# Altium PCB BEE-DAL_EXP.PcbDoc (part 3 of 5)
Units mm, origin at the board's own origin, x right, y up, seen from the top; angles counter-clockwise.
Board outline 93 x 90 mm, 6 copper layers (L1 TOP, L2 GND, L3 SIGNAL, L4 PWR, L5 GND, L6 BOT), stack 1.516 mm thick; 548 components, 447 nets, 1827 pads, 1142 vias.
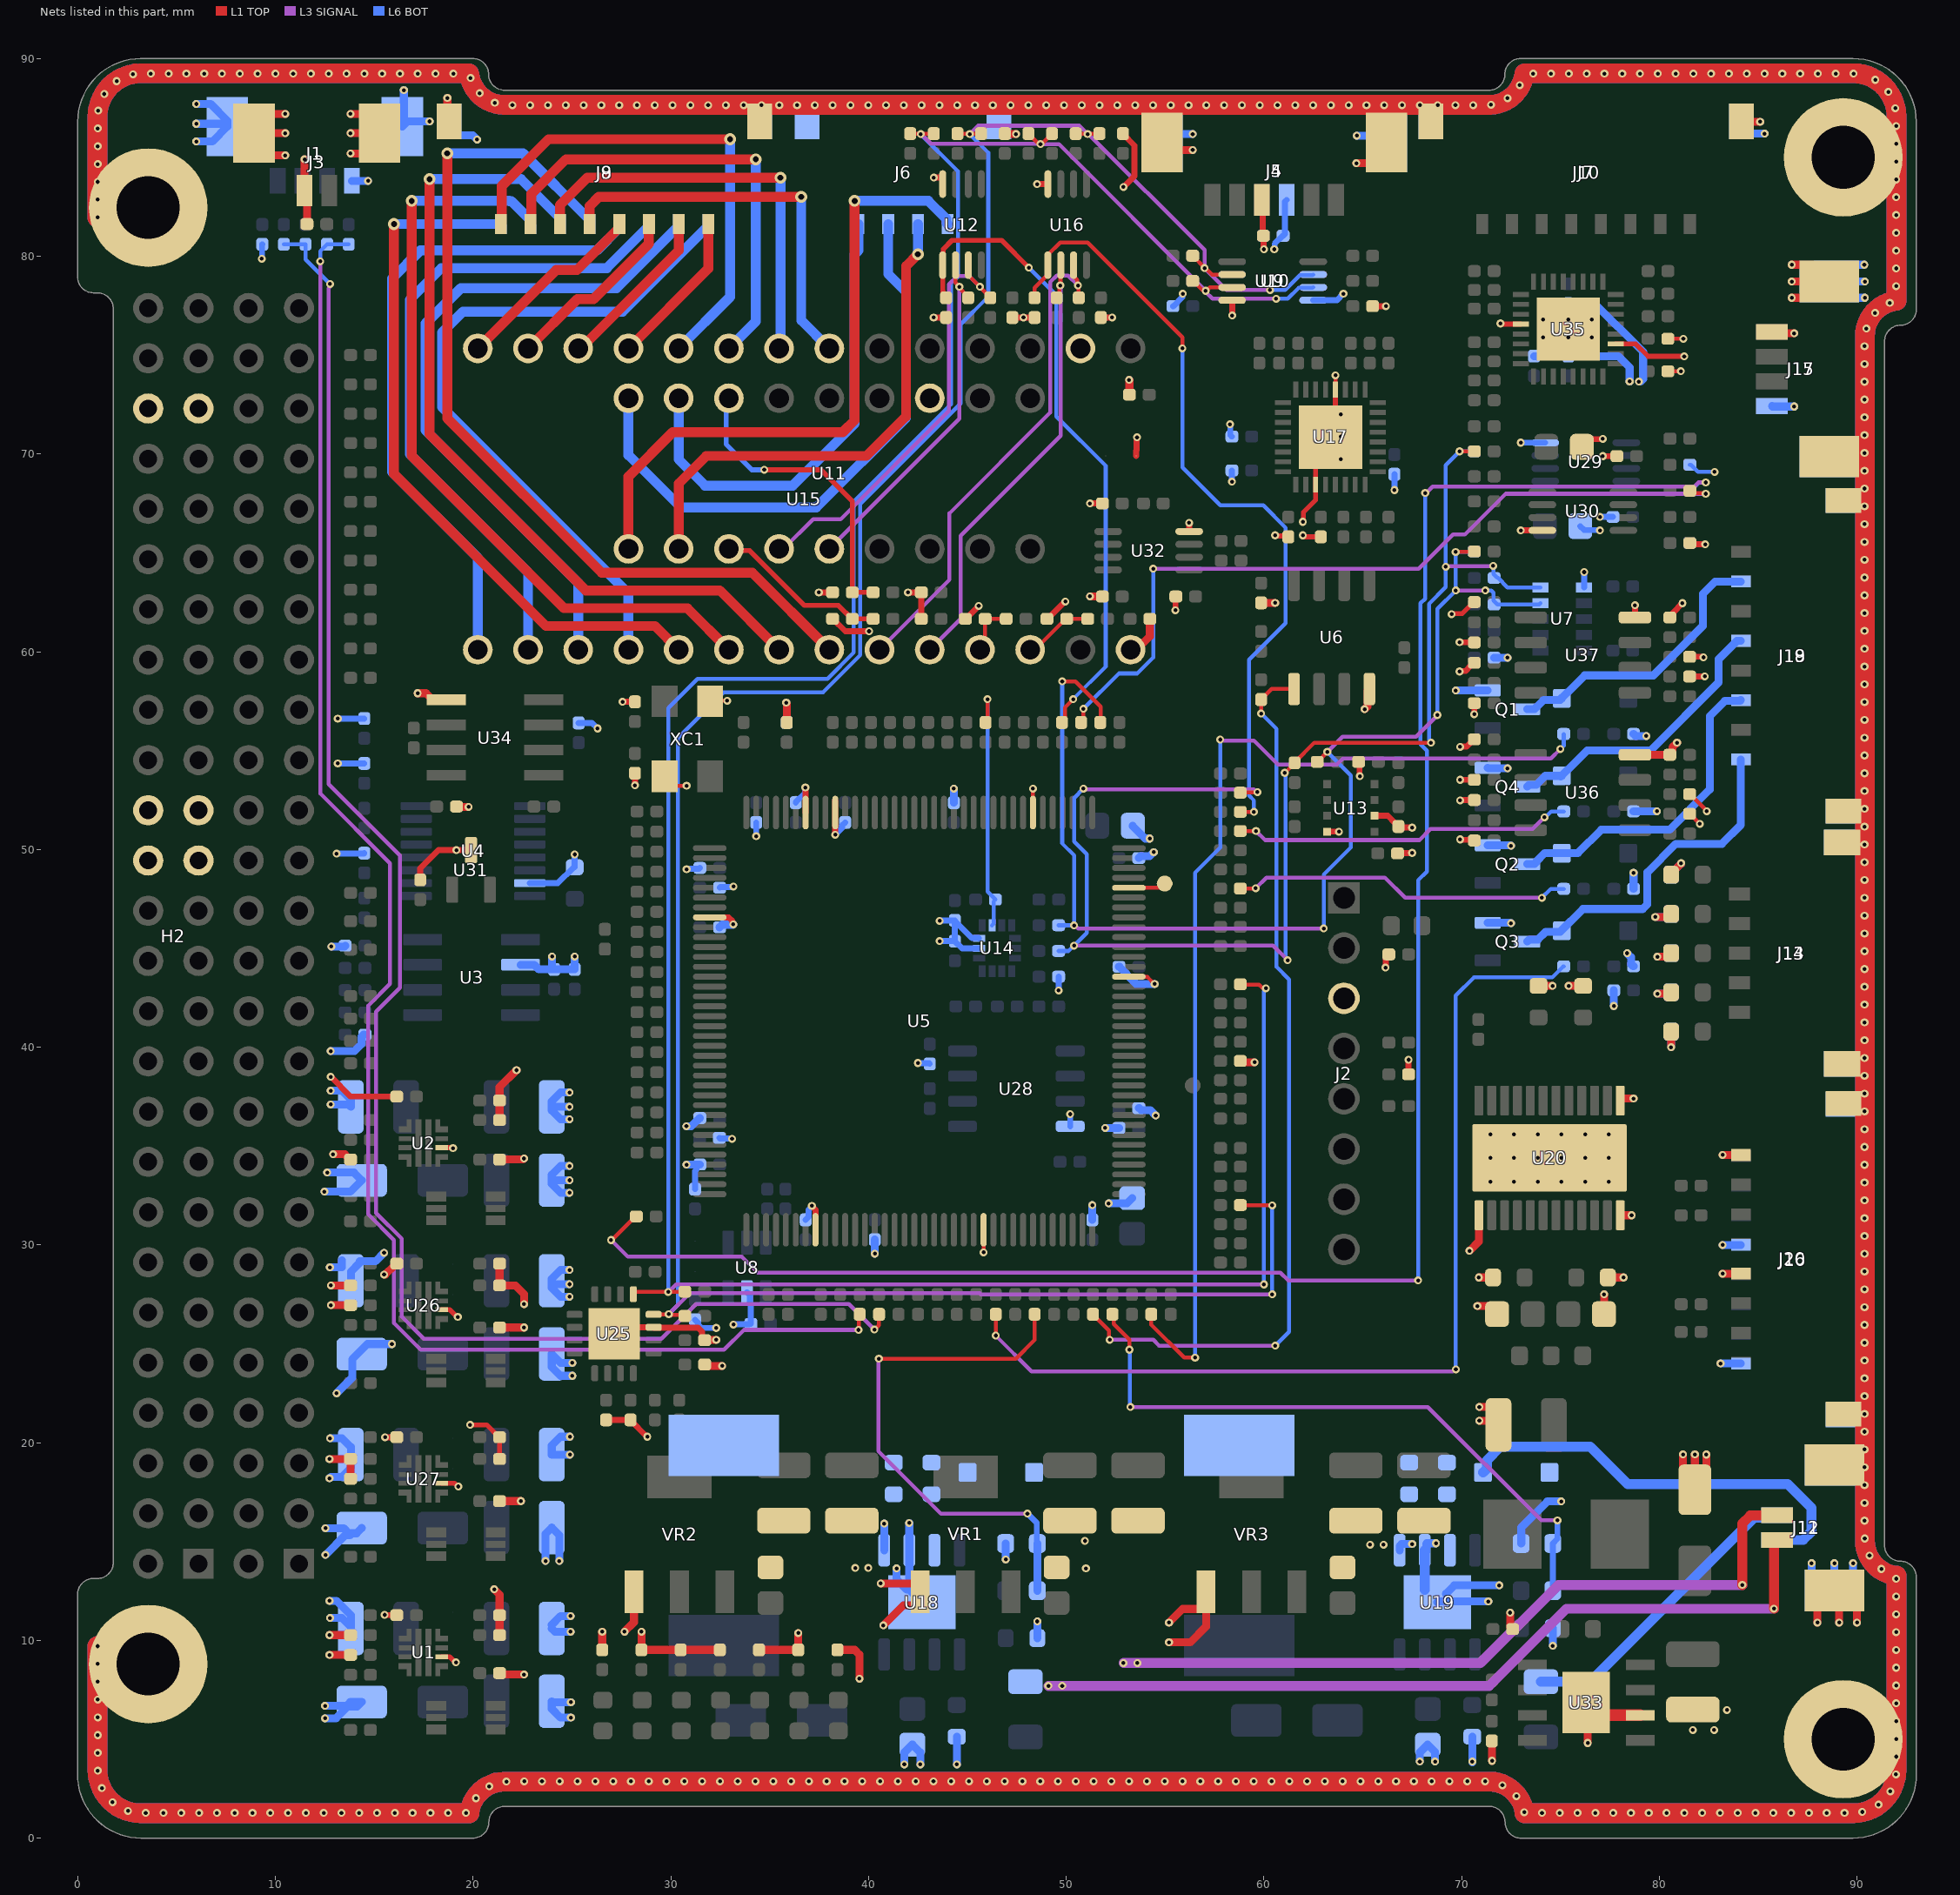
[diagram p7: the nets of this part, all layers, seen from the top]

## Via types
v1: diameter 0.4, hole 0.2, L1 TOP to L6 BOT, tented both sides, 1132 vias
v2: diameter 0.6, hole 0.3, L1 TOP to L6 BOT, tented both sides, 10 vias

## Nets (pads, with @x,y where several pads share a name; then routed paths per layer and width w, separated by ;. In a path a pad name is that pad's centre, name@x,y a point inside that pad or via, vN(x,y) a via of type N, cw(c..) or ccw(c..) an arc to the next point about the centre after c; other vN are vias at no path point) (continued)
GND: C1.1 C2.1 C3.1 C4.1 C5.1 C6.1 C7.1 C8.1 C9.1 C10.1 C11.1 C12.1 C13.2 C14.2 C15.2 C16.1 C18.1 C20.1 C21.1 C22.1 C23.1 C24.1 C25.1 C26.1 C27.2 C28.2 C29.1 C30.1 C31.1 C32.1 C33.1 C34.1 C35.1 C36.1 C37.1 C38.1 C39.1 C40.1 C41.1 C42.1 C43.1 C44.1 C45.1 C46.1 C47.1 C48.1 C49.1 C50.1 C51.1 C52.1 C53.1 C54.1 C55.1 C56.1 C57.1 C58.1 C59.1 C60.1 C61.1 C62.1 C63.1 C64.1 C67.1 C68.2 C71.1 C72.1 C73.2 C76.1 C77.1 C78.2 C79.2 C80.1 C81.1 C82.1 C83.1 C84.1 C85.1 C86.1 C87.1 C88.1 C89.1 C90.1 C91.1 C92.1 C93.1 C109.2 C110.2 C111.2 C112.2 C113.2 C114.1 C115.1 C116.2 C117.1 C118.1 C119.2 C120.1 C121.1 C122.1 C123.1 C124.1 C125.1 C126.1 C127.1 C128.1 C129.1 C130.1 C131.1 C132.1 C133.1 C134.1 C136.2 C137.1 C138.2 C139.1 C141.1 C143.1 C144.1 C164.1 C165.1 C166.2 C167.1 C168.1 C169.1 C170.1 C171.1 C172.1 C173.1 C174.1 C175.1 C176.1 C177.1 C178.1 C179.1 C406.1 C407.1 C408.1 C411.1 D1.2 D2.2 D8.2 D9.2 D17.2 H2.29 H2.30 H2.31 H2.32 H2.47 H2.48 Hole1.1 Hole2.1 Hole3.1 Hole4.1 J1.4 J1.M1 J1.M2 J2.3 J3.2 J3.M1 J3.M2 J4.4 J4.M1 J4.M2 J5.4 J5.M1 J5.M2 J6.M1 J6.M2 J7.M1 J7.M2 J8.M1 J8.M2 J9.M1 J9.M2 J10.M1 J10.M2 J11.M1 J11.M2 J12.M1 J12.M2 J13.M1 J13.M2 J14.M1 J14.M2 J15.4 J15.M1 J15.M2 J16.4 J16.8 J16.M1 J16.M2 J17.4 J17.M1 J17.M2 J18.M1 J18.M2 J19.M1 J19.M2 J20.4 J20.8 J20.M1 J20.M2 JP4.1 Q1.2 Q2.2 Q3.2 Q4.2 R5.1 R6.2 R7.1 R8.1 R13.1 R14.1 R15.1 R16.1 R20.1 R35.2 R91.1 R113.1 R124.1 R125.1 R130.2 R133.2 R135.1 R144.2 R152.2 R154.1 R156.1 R163.2 R172.1 R175.2 R178.2 R256.1 R257.1 R258.1 R263.1 R264.2 R265.1 R266.1 R271.1 R272.2 R273.1 R274.1 R278.2 R288.2 R299.2 R319.1 R320.1 R322.1 R332.2 R338.1 R339.1 R342.1 R343.1 R346.1 R349.1 R352.1 R355.1 R417.1 U1.8 U2.8 U3.2 U4.15 U5.8 U5.44 U5.61 U5.95 U5.115 U5.135 U5.138 U6.4 U7.6 U8.2 U9.4 U10.4 U11.3 U12.4 U13.1 U13.7 U14.6 U14.7 U15.1 U15.27 U16.4 U17.4 U17.19 U17.33 U18.1 U18.2 U18.9 U19.1 U19.2 U19.9 U20.1 U20.13 U20.24 U20.25 U25.3 U25.17 U26.8 U27.8 U28.4 U29.4 U30.4 U31.3 U32.4 U33.6 U33.9 U34.5 U35.4 U35.19 U35.33 U36.4 U37.4 VR1.1 VR2.1 VR3.1 XC1.2 XC1.4 | length 989.6
  L1 TOP w0.2: XC1.4@29.69,53.695 30.165,53.22 v1(30.8,53.22) ; XC1.2@31.99,57.495 31.99,57.485 31.995,57.48 32.034,57.519 v1(32.858,57.519) ; v1@45.821,29.621 U5.61@45.822,30.764 ; U5.115@48.322,51.864 v1@48.321,53.074 ; U5.95@53.172,43.564 53.191,43.545 54.113,43.545 54.458,43.2 v1(54.475,43.2) ; U17.4@63.62,73.25 v1(63.62,73.974) ; R417.1@80.435,74.183 v1(81.093,74.183) ; C411.1@80.435,75.825 v1(81.218,75.825) ; C172.1@81.535,51.801 81.548,51.801 82.047,51.302 v1(82.047,51.29) ; C171.1@81.535,52.796 81.56,52.796 82.4,51.956 v1(82.4,51.934)
  L1 TOP w0.25: U1.8@18.412,9.167 18.818,9.167 19.095,8.89 v1(19.135,8.89) ; U27.8@18.412,17.942 19.057,17.942 19.219,17.78 v1(19.26,17.78) ; U26.8@18.412,26.721 18.822,26.721 19.19,26.353 v1(19.231,26.353) ; U2.8@18.412,34.919 18.963,34.919 v1(18.989,34.893) ; v1(19.85,20.9) 20.69,20.9 21.318,20.272 C132.1@21.343,20.272 R274.1@21.343,19.172 ; v1(60.571,65.885) 60.6,65.857 61.189,65.857 R172.1@61.237,65.809 ; v1(61.975,65.885) 61.975,65.862 62.029,65.809 C67.1@62.879,65.809 ; v1(61.975,66.569) 62.004,66.598 62.004,67.058 62.62,67.674 U17.19@62.62,68.45 62.62,70.1 U17.33@63.37,70.85 ; U17.33@63.62,71.1 U17.4@63.62,73.25 ; v1(69.5,61.9) 69.519,61.919 70.026,61.919 70.618,62.511 R355.1@70.643,62.511 ; v1(71.968,76.6) 72.009,76.6 72.043,76.566 U35.4@72.993,76.566 ; U35.19@77.794,75.566 78.802,75.566 79.432,74.937 v1(81.263,74.937)
  L1 TOP w0.3: v1(12.8,38.5) 12.807,38.5 13.806,37.501 C10.1@16.14,37.501 ; v1(15.53,11.29) 15.539,11.281 16.131,11.281 C4.1@16.14,11.273 ; v1(15.55,20.272) C131.1@16.14,20.272 ; C141.1@17.33,48.462 17.33,49.045 18.247,49.962 v1(19.16,49.962) U31.3@19.9,49.962 ; C109.2@26.733,21.148 C111.2@27.966,21.148 ; U25.17@27.458,25.833 U25.3@29.133,25.833 ; v1(27.558,57.468) v1(27.558,57.468) 28.189,57.466 C25.1@28.19,57.465 ; C111.2@27.966,21.123 28.789,20.3 v1(28.814,20.3) ; v1(28.19,53.241) C26.1@28.19,53.855 ; U25.3@29.153,25.813 31.38,25.813 31.578,25.615 31.578,25.315 31.693,25.2 C112.2@31.715,25.178 ; U5.8@31.972,46.564 32.936,46.564 33.116,46.385 33.116,46.291 33.166,46.241 v1(33.166,46.214) ; v1(36.809,53.128) 36.822,53.116 U5.138@36.822,51.864 ; v1(37.14,31.975) 37.14,31.948 37.322,31.766 U5.44@37.322,30.764 ; v1(37.49,63) R91.1@38.184,63 ; R135.1@38.184,61.66 38.209,61.66 38.833,61.036 v1(40.031,61.036) ; v1(38.322,50.745) U5.135@38.322,51.864 U5.135@38.322,52.458 ; v1(42,63) C52.1@42.675,63 C53.1@42.675,61.66 ; v1(43.3,76.9) R332.2@43.927,76.9 ; v1(43.305,83.981) 43.732,83.981 43.755,83.957 U12.4@43.755,83.65 ; R156.1@44.9,61.66 44.925,61.66 45.575,62.31 v1(45.575,62.318) ; C168.1@47.283,76.9 v1(47.842,76.9) R163.2@48.401,76.9 ; v1(48.527,83.65) U16.4@49.076,83.65 ; R154.1@49.027,61.66 49.052,61.66 49.909,62.518 49.937,62.518 v1(49.956,62.537) ; v1(51.2,67.5) R278.2@51.834,67.5 ; C61.1@51.757,76.9 v1(52.322,76.9) ; C60.1@52.875,86.2 52.875,86.175 53.45,85.6 53.45,84.05 v1(52.9,83.5) ; JP4.1@53.537,69.9 53.537,70.168 53.565,70.196 53.565,70.823 v1(53.584,70.842) ; v1(55.523,62.1) 55.535,62.112 55.535,62.78 C165.1@55.548,62.793 ; U32.4@56.223,66.082 v1(56.223,66.521) ; U9.4@58.395,77.775 58.4,77.77 v1(58.4,77) ; J4.4@59.9,82.85 59.9,82.55 59.938,82.513 59.938,81.071 C50.1@59.963,81.071 ; C50.1@59.975,81.034 60,81.034 59.987,81.022 59.987,80.365 v1(60,80.352) ; U13.1@63.2,50.9 v1(63.8,50.9) ; R144.2@64.79,54.43 64.837,54.384 64.837,53.719 v1(64.856,53.7) ; R130.2@65.5,77.475 v1(66.177,77.475) ; U13.7@65.6,51.7 66.269,51.7 66.634,51.335 66.659,51.335 66.809,51.185 C54.1@66.809,51.16 66.85,51.119 67.481,51.119 v1(67.5,51.1) ; v1(66.15,44.025) 66.169,44.044 66.169,44.54 R35.2@66.32,44.69 ; C55.1@66.759,49.8 66.771,49.812 67.487,49.812 v1(67.5,49.825) ; C23.1@67.32,38.625 v1(67.32,39.364) ; v1(69.9,59) 69.919,59.019 70.195,59.019 70.488,59.312 70.513,59.312 C179.1@70.643,59.443 ; v1(69.9,60.481) 69.908,60.473 70.636,60.473 C178.1@70.643,60.466 ; v1(69.925,52.485) 69.932,52.492 70.637,52.492 C174.1@70.643,52.498 ; v1(69.927,50.507) 69.946,50.488 70.608,50.488 C170.1@70.643,50.453 ; v1(69.927,53.521) C173.1@70.643,53.521 70.751,53.521 C173.1@70.768,53.538 ; v1(69.927,55.185) 69.946,55.204 70.256,55.204 70.618,55.567 R349.1@70.643,55.567 ; v1(70.643,56.837) C175.1@70.643,57.397 ; v1(72.993,66.134) U30.4@74.085,66.134 U30.4@74.429,66.134 ; C138.2@76.086,70.365 76.47,70.749 77.124,70.749 v1(77.143,70.769) ; v1(77.145,69.889) C139.1@77.854,69.889 ; U37.4@78.77,61.731 v1(78.77,62.35) ; R352.1@80.535,61.731 80.56,61.731 80.71,61.881 80.71,61.991 v1@81.153,62.434 ; C177.1@81.535,58.745 81.537,58.748 82.298,58.748 v1(82.3,58.75) ; C176.1@81.535,59.741 81.541,59.747 82.179,59.747 82.211,59.715 v1(82.238,59.715) ; R299.2@81.543,65.497 81.606,65.434 v1@82.298,65.434
  L1 TOP w0.4: J3.M2@8.925,86.35 9.775,87.2 v1(10.5,87.2) ; v1(10.5,85.1) 9.775,85.1 8.925,85.95 J3.M2@8.925,86.221 v1(10.5,86.221) ; v1(11.475,84.9) J3.2@11.475,83.321 11.6,83.196 C47.1@11.6,81.63 ; v1(12.74,9.263) R7.1@13.805,9.263 ; v1(12.74,10.268) R6.2@13.805,10.268 ; v1(12.74,19.172) R272.2@13.805,19.172 R273.1@13.805,18.172 ; v1@12.811,26.951 R265.1@13.805,26.951 ; v1@12.811,27.951 R264.2@13.805,27.951 ; v1(12.919,34.581) 13.516,34.581 13.78,34.317 R15.1@13.805,34.317 ; v1(13.8,85.2) 14.425,85.2 15.275,86.05 J3.M1@15.275,86.221 ; v1(13.8,86.221) J3.M1@15.275,86.221 ; v1(13.8,87.2) 14.425,87.2 15.275,86.35 J3.M1@15.275,86.221 ; v1(15.5,28.5) 15.564,28.5 16.015,28.951 16.04,28.951 C125.1@16.14,29.051 ; v1(17.2,57.9) 17.623,57.9 17.863,57.66 17.863,57.635 17.934,57.565 U34.5@18.654,57.565 U34.5@18.685,57.565 ; v1(18.7,88) 18.7,86.915 J9.M2@18.795,86.82 ; C134.1@19.16,52.17 19.175,52.155 v1(19.77,52.155) ; v1(21.07,12.58) 21.343,12.307 C5.1@21.343,11.273 R8.1@21.343,10.291 ; C6.1@21.343,8.341 21.411,8.273 v1(22.577,8.273) ; C133.1@21.343,17.042 v1(22.42,17.042) ; C127.1@21.343,25.821 v1(22.583,25.821) ; R266.1@21.343,27.951 C126.1@21.343,29.051 ; C12.1@21.343,34.317 22.53,34.317 v1(22.583,34.37) ; R16.1@21.343,36.317 C11.1@21.343,37.301 21.343,37.98 v1(22.2,38.837) ; R266.1@21.368,27.951 22.14,27.951 22.583,27.508 v1(22.583,27.002) ; R5.1@26.535,9.52 v1(26.535,10.44) ; U25.17@27.133,25.508 U25.17@27.458,25.833 ; v1(27.664,10.44) 28.139,10.915 VR2.1@28.139,12.461 ; v1(28.518,10.44) R271.1@28.518,9.52 R263.1@30.501,9.52 R13.1@32.483,9.52 ; C112.2@31.64,25.2 31.693,25.2 v1(32.3,25.2) ; C110.2@31.715,23.95 31.773,23.95 31.84,23.883 v1(32.6,23.883) ; R257.1@34.466,9.52 R258.1@36.448,9.52 36.448,10.368 v1(36.45,10.37) ; v1(35.84,57.425) 35.87,57.395 R113.1@35.87,56.42 ; R256.1@38.431,9.52 39.306,9.52 39.54,9.286 v1(39.54,8.06) ; v1(40.62,12.88) 42.338,12.88 42.613,12.605 VR1.1@42.613,12.461 42.613,12.058 42.338,11.783 41.773,11.783 v1(40.75,10.76) ; C167.1@46.894,86.2 46.919,86.175 v1(47.465,86.175) ; v1(51.2,62.8) 51.827,62.8 C164.1@51.834,62.793 ; v1(53.181,73.747) 53.2,73.728 C58.1@53.2,73 ; U15.1@53.26,60.1 53.558,60.1 54.234,60.777 54.234,61.56 C59.1@54.234,61.66 ; J4.M2@54.85,85.75 54.85,85.45 54.925,85.375 v1(56.4,85.375) ; v1(55.2,9.9) 56.279,9.9 57.075,10.696 VR3.1@57.075,11.861 ; v1(55.2,10.9) 55.886,11.586 56.8,11.586 VR3.1@57.075,11.861 ; VR3.1@57.075,12.461 VR3.1@57.075,11.861 ; R14.1@58.808,39.301 58.869,39.24 v1(59.53,39.24) ; C48.1@59.86,62.47 v1(60.571,62.47) ; v1(64.675,84.7) 65.35,84.7 66.2,85.55 J4.M1@66.2,85.75 ; v1(65.1,57.095) 65.241,57.236 65.241,58.017 U6.4@65.336,58.112 ; v1(70.4,29.7) 70.876,30.176 U20.13@70.876,31.5 ; v1(70.8,26.904) 71.399,26.904 71.795,26.508 C78.2@71.795,26.5 ; v1(70.876,28.353) C81.1@71.592,28.353 ; v1(70.9,21.106) 71.661,21.106 C22.1@71.867,20.9 71.867,21.354 71.421,21.8 v1(70.9,21.8) ; R322.1@71.532,4.912 71.532,3.918 v1(71.54,3.91) ; v1(72.457,11.4) 72.457,10.667 72.557,10.567 C21.1@72.582,10.567 ; C82.1@73.894,43.1 v1(74.6,43.1) ; v1(75.413,43.1) C83.1@76.151,43.1 ; v1(76.38,4.81) U33.9@76.38,6.538 ; C79.2@77.2,26.5 77.207,26.507 v1(77.207,27.5) ; C80.1@77.4,28.353 v1(78.195,28.353) ; U20.24@78.026,31.5 v1(78.6,31.5) ; U20.1@78.026,37.3 78.026,37.375 78.051,37.4 v1(78.7,37.4) ; U36.4@78.77,54.787 R346.1@80.449,54.787 ; v1(79.8,46.582) 80.445,46.582 C90.1@80.6,46.738 ; v1(79.9,42.7) 80.53,42.7 C92.1@80.6,42.77 ; v1(79.9,44.572) 80.418,44.572 C91.1@80.6,44.754 ; R346.1@80.535,54.787 80.56,54.787 80.66,54.887 80.66,55.166 80.894,55.4 v1(80.9,55.4) ; v1(80.6,40) C93.1@80.6,40.786 ; C89.1@80.6,48.721 80.6,48.771 81.1,49.271 v1(81.1,49.3) ; v1(81.2,19.4) 81.204,19.396 81.204,18.212 D17.2@81.8,17.617 ; v1(81.8,19.4) D17.2@81.8,17.617 ; v1(82.377,19.396) 82.377,18.194 D17.2@81.8,17.617 ; v1(83.2,28.548) J20.4@84.13,28.548 ; v1(83.2,34.548) J20.8@84.13,34.548 ; J10.M1@84.155,86.82 84.175,86.8 v1(85.1,86.8) ; J17.4@85.7,76.172 85.772,76.1 v1(86.825,76.1) ; v1(86.7,77.9) 87.778,77.9 J17.M2@88.6,78.722 ; v1(86.7,78.722) J17.M2@88.6,78.722 ; v1(86.7,79.572) 87.75,79.572 J17.M2@88.6,78.722 ; v1(88,10.9) 88,11.675 88.85,12.525 J11.M1@88.862,12.525 ; v1(89.1,10.9) 89.1,12.287 J11.M1@88.862,12.525 ; v1(90,10.9) 90,11.675 89.15,12.525 J11.M1@88.862,12.525
  L1 TOP w0.6: U33.9@76.31,6.848 76.945,6.213 U33.6@79.034,6.213
  L1 TOP w1: v1@1,3.454 ccw(c3.2,3.454) 3.2,1.254 4.343,1.254 5.243,1.254 6.143,1.254 7.043,1.254 7.943,1.254 8.843,1.254 9.743,1.254 10.643,1.254 11.543,1.254 12.443,1.254 13.343,1.254 14.243,1.254 15.143,1.254 16.043,1.254 16.943,1.254 17.843,1.254 18.743,1.254 19.811,1.254 cw(c21.6,1.054) v1@21.561,2.854 ; v1@1,3.467 1,4.307 1,5.207 1,6.107 1,7.007 1,7.907 1,8.807 Hole1.1@1,9.707 ; Hole2.1@1,81.963 1,82.863 1,83.763 1,84.663 1,85.563 1,86.463 1,87.054 cw(c3.2,87.054) 3.163,89.254 ; 3.175,89.254 3.702,89.254 4.602,89.254 5.502,89.254 6.402,89.254 7.302,89.254 8.202,89.254 9.102,89.254 10.002,89.254 10.902,89.254 11.802,89.254 12.702,89.254 13.602,89.254 14.502,89.254 15.402,89.254 16.302,89.254 17.202,89.254 18.102,89.254 19.002,89.254 19.8,89.254 ccw(c21.589,89.454) 21.561,87.654 ; v1@21.59,2.854 22.587,2.854 23.487,2.854 24.387,2.854 25.287,2.854 26.187,2.854 27.087,2.854 27.987,2.854 28.887,2.854 29.787,2.854 30.687,2.854 31.587,2.854 32.487,2.854 33.387,2.854 34.287,2.854 35.187,2.854 36.087,2.854 36.987,2.854 37.887,2.854 38.787,2.854 39.687,2.854 40.587,2.854 41.487,2.854 42.387,2.854 43.287,2.854 44.187,2.854 45.087,2.854 45.987,2.854 46.887,2.854 47.787,2.854 48.687,2.854 49.587,2.854 50.975,2.854 51.387,2.854 52.287,2.854 53.187,2.854 54.087,2.854 54.987,2.854 55.887,2.854 56.787,2.854 57.687,2.854 58.587,2.854 59.487,2.854 60.387,2.854 61.287,2.854 62.026,2.854 62.187,2.854 63.087,2.854 63.987,2.854 64.887,2.854 65.787,2.854 66.687,2.854 67.587,2.854 68.487,2.854 69.387,2.854 70.287,2.854 71.187,2.854 71.399,2.854 ; 21.59,87.653 21.99,87.653 22.89,87.653 23.79,87.653 24.69,87.653 25.59,87.653 26.49,87.653 27.39,87.653 28.29,87.653 29.19,87.653 30.09,87.653 30.99,87.654 31.89,87.654 32.79,87.654 33.69,87.654 34.59,87.654 35.49,87.654 36.39,87.654 37.29,87.654 38.119,87.654 38.19,87.654 39.09,87.654 39.99,87.654 40.89,87.654 41.79,87.654 42.015,87.654 42.69,87.654 43.59,87.654 44.49,87.654 45.39,87.654 46.29,87.654 47.19,87.654 48.09,87.654 48.99,87.654 49.89,87.654 50.79,87.654 51.69,87.654 52.59,87.654 53.49,87.654 54.39,87.654 55.29,87.654 56.19,87.654 57.09,87.654 57.99,87.654 58.89,87.654 59.79,87.654 60.69,87.654 61.59,87.654 62.49,87.654 63.39,87.654 64.29,87.654 65.19,87.654 66.09,87.654 66.99,87.654 67.89,87.654 68.79,87.654 69.69,87.654 70.59,87.654 v1@71.399,87.654 ; 71.429,2.854 cw(c71.4,1.054) 73.189,1.254 74.069,1.254 74.969,1.254 75.869,1.254 76.769,1.254 77.669,1.254 78.569,1.254 79.469,1.254 80.369,1.254 81.269,1.254 82.169,1.254 83.069,1.254 83.969,1.254 84.869,1.254 85.769,1.254 86.669,1.254 87.569,1.254 88.469,1.254 89.8,1.254 ccw(c89.8,3.454) 92,3.454 92,4.117 92,5.017 92,5.917 92,6.817 92,7.717 92,8.617 92,9.517 92,10.417 92,11.317 92,12.217 92,13.265 cw(c92.2,15.054) v1@90.4,15.049 ; v1@71.429,87.654 ccw(c71.389,89.454) 73.178,89.254 74.525,89.254 75.425,89.254 76.325,89.254 77.225,89.254 78.125,89.254 79.025,89.254 79.925,89.254 80.825,89.254 81.725,89.254 82.625,89.254 83.525,89.254 84.425,89.254 85.325,89.254 86.225,89.254 87.125,89.254 88.025,89.254 88.925,89.254 v1@89.789,89.254 ; v1@89.815,89.254 cw(c89.8,87.054) 92,87.06 92,85.684 92,84.784 92,83.884 92,82.984 92,82.084 92,81.184 92,80.284 92,79.384 92,78.484 92,77.75 ccw(c92.2,75.961) 90.4,75.961 ; v1@90.4,15.054 90.4,16.052 90.4,16.952 90.4,17.852 90.4,18.752 90.4,19.652 90.4,20.552 90.4,21.452 90.4,22.352 90.4,23.252 90.4,24.152 90.4,25.052 90.4,25.952 90.4,26.852 90.4,27.752 90.4,28.652 90.4,29.552 90.4,30.452 90.4,31.352 90.4,32.252 90.4,33.152 90.4,34.052 90.4,34.952 90.4,35.852 90.4,36.752 90.4,37.652 90.4,38.552 90.4,39.452 90.4,40.352 90.4,41.252 90.4,42.152 90.4,43.052 90.4,43.952 90.4,44.852 90.4,45.752 90.4,46.652 90.4,47.552 90.4,48.452 90.4,49.352 90.4,50.252 90.4,51.152 90.4,52.052 90.4,52.952 90.4,53.852 90.4,54.752 90.4,55.652 90.4,56.552 90.4,57.452 90.4,58.352 90.4,59.252 90.4,60.152 90.4,61.052 90.4,61.952 90.4,62.852 90.4,63.752 90.4,64.652 90.4,65.552 90.4,66.452 90.4,67.352 90.4,68.252 90.4,69.152 90.4,70.052 90.4,70.952 90.4,71.852 90.4,72.752 90.4,73.652 90.4,74.552 90.4,75.452 90.4,75.956
  L6 BOT w0.2: R288.2@81.543,69.457 81.595,69.457 81.953,69.099 v1@82.797,69.099
  L6 BOT w0.3: v1(9.31,79.87) 9.325,79.885 9.325,80.59 C18.1@9.34,80.605 ; v1(13.1,49.784) 13.113,49.797 14.487,49.797 C144.1@14.501,49.811 ; v1(13.156,54.35) C143.1@14.501,54.35 ; v1(13.156,56.619) R319.1@14.501,56.619 ; U4.15@22.871,48.294 24.286,48.295 25.09,49.098 C16.1@25.14,49.098 v1(25.14,49.748) ; R320.1@25.34,56.398 26.019,56.398 v1(26.3,56.117) ; v1(30.8,48.998) 30.82,49.017 31.424,49.017 C38.1@31.472,49.064 ; R125.1@31.228,26.213 31.378,26.063 31.378,25.976 31.554,25.8 v1(32.3,25.8) ; R124.1@31.228,32.819 31.228,33.739 31.297,33.807 31.297,33.914 31.437,34.055 31.447,34.064 C40.1@31.472,34.064 ; C31.1@32.457,35.414 32.491,35.381 33.082,35.381 v1(33.101,35.362) ; C29.1@32.472,48.064 32.51,48.103 33.151,48.103 v1(33.17,48.122) ; v1(33.172,25.97) 33.189,25.987 33.936,25.987 C49.1@33.948,25.976 ; U8.2@33.853,27.606 33.998,27.461 33.998,27.031 34.053,26.976 C49.1@34.053,26.004 ; v1(34.322,50.664) C37.1@34.322,51.364 ; C45.1@36.322,52.364 36.322,52.389 36.79,52.858 36.79,53.109 v1(36.809,53.128) ; C32.1@36.822,31.264 36.972,31.414 36.972,31.78 37.14,31.948 v1(37.14,31.975) ; v1@38.341,50.765 38.672,51.095 38.672,51.214 C36.1@38.822,51.364 ; v1(42.5,39.2) 42.519,39.181 43.075,39.181 C166.2@43.1,39.156 ; v1(43.6,45.364) C56.1@44.369,45.364 C57.1@44.369,46.389 ; v1(43.6,46.389) 43.612,46.402 44.357,46.402 C57.1@44.369,46.414 C57.1@44.369,46.389 ; C56.1@44.369,45.339 44.519,45.189 44.544,45.189 44.733,45 U14.6@45.59,45 ; U14.7@45.59,45.5 45.565,45.525 45.233,45.525 C57.1@44.369,46.389 ; R152.2@49.619,43.564 R152.2@49.619,43.564 49.62,42.871 v1(49.621,42.87) ; U28.4@50.204,35.995 v1(50.204,36.614) ; R133.2@55.4,77.475 55.425,77.475 55.881,77.931 55.881,78.081 v1(55.9,78.1) ; v1(58.287,71.5) 58.306,71.481 58.306,70.959 C64.1@58.385,70.88 ; v1(58.385,68.6) C63.1@58.385,69.163 ; v1(60.525,80.352) 60.544,80.371 60.544,80.628 60.95,81.034 C51.1@60.975,81.034 61.063,81.122 61.063,82.762 J5.4@61.15,82.85 ; U10.4@62.495,77.775 63.698,77.775 v1(64.023,78.1) ; v1(66.604,68.175) C62.1@66.604,68.973 ; v1(72.993,70.572) U29.4@74.233,70.572 ; C136.2@76.008,66.347 76.202,66.154 76.981,66.154 v1(77,66.134) ; U7.6@76.194,63.253 76.198,63.257 76.198,64.023 v1(76.202,64.027) ; v1(77,66.817) C137.1@77.658,66.817
  L6 BOT w0.4: v1(6,85.8) 6.814,85.8 J1.M1@7.574,86.56 ; v1(6,86.7) 7.434,86.7 J1.M1@7.574,86.56 ; v1(6,87.7) 6.724,87.7 7.574,86.85 J1.M1@7.574,86.56 ; v1(12.48,32.689) 13.791,32.689 D2.2@14.369,33.267 13.977,33.659 v1(12.62,33.659) ; v1(12.51,6.059) 13.069,6.059 D1.2@13.66,6.65 ; v1(12.51,6.69) 13.52,6.69 D1.2@13.56,6.65 ; v1(12.536,14.32) 13.541,15.325 D9.2@13.771,15.325 ; v1(12.536,15.675) 13.455,15.675 D9.2@13.75,15.38 ; v1(12.74,12) 13.091,12 13.819,11.273 C3.1@13.819,10.684 ; v1(12.74,18.195) 12.817,18.272 13.372,18.272 13.819,18.718 C130.1@13.819,19.393 13.819,19.774 13.372,20.22 v1(12.77,20.22) ; v1(12.76,28.862) 13.372,28.862 C124.1@13.372,29.22 ; v1(12.77,11.13) 13.372,11.13 C3.1@13.819,10.684 ; v1(12.8,37.1) 13.701,37.1 C9.1@13.819,36.982 13.819,37.354 13.372,37.8 v1(12.8,37.8) ; v1(12.8,39.8) 14,39.8 14.365,40.165 14.365,40.533 14.465,40.633 C15.2@14.483,40.633 ; v1(12.829,45.09) 13.491,45.09 R20.1@13.533,45.133 ; v1(13.094,22.49) 13.885,23.281 13.885,24.213 14.657,24.984 v1(15.896,24.984) ; D9.2@13.81,15.415 14.106,15.415 D9.2@14.369,15.678 ; C3.1@13.819,10.598 C3.1@13.819,10.684 ; C124.1@13.819,28.187 13.819,28.644 14.265,29.09 14.265,29.169 15.069,29.169 v1(15.5,29.6) ; J1.4@13.874,83.81 v1(14.69,83.81) ; J1.M2@16.424,86.56 J1.M2@16.5,86.636 ; v1(16.5,88.4) J1.M2@16.5,86.636 ; v1(17.8,86.82) 16.684,86.82 J1.M2@16.5,86.636 ; J8.M1@18.795,86.82 18.795,86.545 19.22,86.12 19.98,86.12 v1(20.2,85.9) ; U3.2@22.402,44.168 23.092,44.168 23.32,43.939 C14.2@24.093,43.939 ; v1(23.67,14.01) 23.67,15.39 C128.1@23.983,15.702 24.36,15.325 v1(24.36,14.01) ; C2.1@23.983,10.598 24.141,10.44 v1(24.93,10.44) ; C2.1@23.983,10.784 24.429,11.23 v1(24.93,11.23) ; C122.1@23.983,24.485 C122.1@23.983,24.48 ; C123.1@23.983,28.187 23.983,27.826 24.429,27.38 v1(24.875,27.38) ; C123.1@23.983,28.284 24.429,28.73 v1(24.875,28.73) ; C7.1@23.983,33.447 C7.1@23.983,33.267 23.983,33.086 24.429,32.64 v1(24.875,32.64) ; C7.1@23.983,33.543 24.429,33.99 v1(24.875,33.99) ; C8.1@23.983,37.162 C8.1@23.983,36.982 23.983,36.801 24.429,36.355 v1(24.875,36.355) ; C8.1@23.983,37.258 24.429,37.705 v1(24.875,37.705) ; v1(24,44.587) 24,44.033 C14.2@24.093,43.939 ; C123.1@24.16,28.01 v1(24.875,28.01) ; C7.1@24.16,33.27 v1(24.875,33.27) ; C8.1@24.16,36.985 v1(24.875,36.985) ; v1(24.9,19.393) C129.1@23.983,19.393 23.983,19.854 24.429,20.3 v1(24.9,20.3) ; v1(24.948,6.09) 24.429,6.09 23.983,6.536 C1.1@23.983,6.92 24.033,6.87 v1(24.948,6.87) ; v1(25.02,23.382) 24.429,23.382 23.983,23.828 C122.1@23.983,24.48 ; v1(25.02,24.033) 24.429,24.033 C122.1@23.983,24.48 ; v1(25.14,44.587) C13.2@25.14,43.933 C14.2@24.1,43.933 C14.2@24.093,43.939 ; v1(30.79,36.003) 31.035,36.003 31.347,36.314 31.372,36.314 C39.1@31.472,36.414 ; v1(30.797,34.055) 31.437,34.055 C40.1@31.462,34.055 ; C30.1@32.472,46.064 32.602,46.195 33.147,46.195 v1(33.166,46.214) ; v1(35.84,57.425) 35.87,57.395 C24.1@35.87,56.42 ; v1(40.319,29.559) 40.319,30.139 40.322,30.142 C41.1@40.322,30.264 ; v1(40.75,10.76) v1@40.754,10.764 ; U18.1@40.797,14.557 40.797,15.907 v1(40.798,15.908) ; v1(41.42,13.64) 41.42,13.081 41.944,12.557 U18.9@42.067,12.557 ; v1(41.814,3.73) 41.814,4.331 42.21,4.728 C68.2@42.218,4.728 42.225,4.728 42.622,4.331 v1(42.622,3.73) ; v1(42.06,15.935) 42.067,15.928 U18.2@42.067,14.557 U18.9@42.067,12.557 ; U18.9@42.702,11.922 U18.9@42.067,12.557 ; v1(44.319,53.075) 44.319,52.367 C44.1@44.322,52.364 ; v1(44.468,3.73) C71.1@44.468,5.128 ; v1(46.942,14.09) R175.2@46.942,14.897 ; C72.1@48.542,10.111 v1(48.542,10.96) ; C33.1@51.322,31.264 v1(51.322,32.01) ; v1(51.97,35.914) C34.1@52.672,35.914 ; v1(52.15,32.1) 53.076,32.1 C27.2@53.34,32.364 ; C35.1@52.672,44.064 52.697,44.064 53.022,43.739 53.022,43.718 53.539,43.2 v1(54.475,43.2) ; C28.2@53.372,51.2 53.372,51.175 53.996,50.55 v1(54.23,50.55) ; C42.1@53.672,36.914 53.697,36.914 53.797,36.814 54.256,36.814 v1(54.53,36.54) ; C43.1@53.672,49.564 53.772,49.664 54.23,49.664 v1(54.43,49.864) ; J5.M1@54.85,85.75 54.85,85.55 54.9,85.5 55.575,86.175 v1(56.4,86.175) ; v1(64.7,86.1) 65.85,86.1 J5.M2@66.2,85.75 ; U19.1@66.869,14.558 66.869,14.775 66.964,14.87 v1(67.5,14.87) ; v1(67.886,3.87) 67.886,4.332 68.282,4.728 C73.2@68.29,4.728 68.66,4.358 v1(68.66,3.87) ; U19.2@68.208,14.489 68.208,14.885 68.234,14.911 v1(68.705,14.911) ; U19.9@68.774,11.923 68.821,11.97 v1(71.35,11.97) ; U19.9@69.209,12.358 69.631,12.78 v1(71.91,12.78) ; v1(69.705,58.041) Q1.2@71.326,58.041 ; v1@70.54,3.842 v1(70.54,3.87) C76.1@70.54,5.128 ; Q3.2@71.326,46.291 72.473,46.291 v1(72.5,46.264) ; Q2.2@71.326,50.207 72.473,50.207 v1(72.5,50.18) ; Q4.2@71.326,54.124 71.353,54.097 v1(72.326,54.097) ; C46.1@71.643,59.7 v1(72.326,59.7) ; R178.2@73.014,14.898 73.025,14.908 73.025,15.711 74.342,17.028 v1(75.039,17.028) ; C406.1@73.668,74.946 C407.1@75.4,74.946 77.925,74.946 78.5,74.371 v1(78.5,73.665) ; v1(74.614,9.719) C77.1@74.614,10.612 ; C408.1@75.4,77.6 76.75,77.6 79.184,75.166 79.184,73.79 79.05,73.657 v1(78.97,73.657) ; v1(77.7,42.082) C169.1@77.7,42.871 ; v1(78.375,44.754) 78.575,44.554 78.575,44.191 78.675,44.091 R342.1@78.7,44.091 ; R339.1@78.7,48.007 v1(78.7,48.817) ; R343.1@78.7,51.924 79.875,51.924 v1(79.885,51.934) ; R338.1@78.7,55.841 78.8,55.741 v1(79.345,55.741) ; v1(79.8,46.582) 80.445,46.582 C87.1@80.6,46.738 ; v1(79.9,42.7) 80.53,42.7 C85.1@80.6,42.77 ; v1(79.9,44.572) 80.418,44.572 C86.1@80.6,44.754 ; v1(80.6,40) C84.1@80.6,40.786 ; C88.1@80.6,48.721 80.6,48.771 81.1,49.271 v1(81.1,49.3) ; v1(83.1,24) J16.8@84.13,24 ; v1(83.2,30) J16.4@84.13,30 ; J7.M2@84.155,86.82 84.155,86.625 84.58,86.2 v1(85.325,86.2) ; J15.4@85.7,72.422 85.722,72.4 v1(86.825,72.4) ; v1(87.7,13.9) 87.7,13.375 88.55,12.525 J12.M2@88.862,12.525 ; v1(88.862,13.9) J12.M2@88.862,12.525 ; v1(89.8,13.9) 89.8,13.375 88.95,12.525 J12.M2@88.862,12.525 ; v1(90.372,79.572) 89.45,79.572 J15.M1@88.6,78.722 ; v1(90.4,77.9) 89.422,77.9 J15.M1@88.6,78.722 ; v1(90.4,78.722) J15.M1@88.6,78.722 ; D1.2@13.56,6.65 13.793,6.883 D1.2@13.893,6.883 ; D1.2@13.56,6.65 D1.2@13.66,6.65 ; D1.2@13.66,6.65 D1.2@13.893,6.883 ; D1.2@13.66,6.65 14.136,6.65 D1.2@14.369,6.883 D1.2@13.893,6.883
  L6 BOT w0.5: U19.9@68.139,12.558 U19.2@68.139,14.558
  L6 BOT w1: v1@1,3.454 ccw(c3.2,3.454) 3.2,1.254 14.243,1.254 19.811,1.254 cw(c21.6,1.054) v1@21.561,2.854 ; v1@1,3.467 Hole1.1@1,9.707 ; Hole2.1@1,81.963 1,87.054 cw(c3.2,87.054) 3.163,89.254 ; 3.175,89.254 19.8,89.254 ccw(c21.589,89.454) 21.561,87.654 ; v1@21.59,2.854 36.087,2.854 36.987,2.854 50.975,2.854 51.387,2.854 51.588,2.854 52.287,2.854 53.187,2.854 54.087,2.854 54.585,2.854 54.987,2.854 55.887,2.854 56.787,2.854 57.687,2.854 58.587,2.854 59.487,2.854 60.387,2.854 61.287,2.854 62.187,2.854 63.087,2.854 63.987,2.854 64.887,2.854 65.787,2.854 66.685,2.854 66.687,2.854 67.587,2.854 68.487,2.854 69.387,2.854 70.287,2.854 71.187,2.854 71.399,2.854 ; 21.59,87.653 21.99,87.653 22.89,87.653 23.79,87.653 24.69,87.653 25.59,87.653 25.841,87.653 26.49,87.653 27.39,87.653 28.29,87.653 29.19,87.653 30.09,87.653 30.99,87.654 31.89,87.654 32.79,87.654 33.69,87.654 34.59,87.654 35.49,87.654 35.551,87.654 36.39,87.654 37.29,87.654 38.19,87.654 39.09,87.654 39.99,87.654 40.89,87.654 41.79,87.654 42.015,87.654 56.19,87.654 57.09,87.654 v1@71.399,87.654 ; 71.429,2.854 cw(c71.4,1.054) 73.189,1.254 89.8,1.254 ccw(c89.8,3.454) 92,3.454 92,13.265 cw(c92.2,15.054) v1@90.4,15.049 ; v1@71.429,87.654 ccw(c71.389,89.454) 73.178,89.254 v1@89.789,89.254 ; v1@89.815,89.254 cw(c89.8,87.054) 92,87.06 92,77.75 ccw(c92.2,75.961) 90.4,75.961 ; v1@90.4,15.054 90.4,20.552 90.4,21.452 90.4,33.152 90.4,34.052 90.4,44.852 90.4,45.752 90.4,57.452 90.4,58.352 90.4,69.152 90.4,70.052 90.4,75.956
  other v1: 3.443,1.271 4.343,1.271 5.243,1.271 6.143,1.271 7.043,1.271 7.943,1.271 8.843,1.271 9.743,1.271 10.643,1.271 11.543,1.271 12.443,1.271 13.343,1.271 14.243,1.271 15.143,1.271 16.043,1.271 16.943,1.271 17.843,1.271 18.743,1.271 19.643,1.271 74.069,1.271 74.969,1.271 75.869,1.271 76.769,1.271 77.669,1.271 78.569,1.271 79.469,1.271 80.369,1.271 81.269,1.271 82.169,1.271 83.069,1.271 83.969,1.271 84.869,1.271 85.769,1.271 86.669,1.271 87.569,1.271 88.469,1.271 89.369,1.271 73.169,1.309 90.267,1.324 2.548,1.368 91.09,1.689 1.765,1.812 20.15,2.015 72.772,2.116 91.687,2.362 1.223,2.53 20.822,2.613 72.065,2.674 21.687,2.861 22.587,2.871 23.487,2.871 24.387,2.871 25.287,2.871 26.187,2.871 27.087,2.871 27.987,2.871 28.887,2.871 29.787,2.871 30.687,2.871 31.587,2.871 32.487,2.871 33.387,2.871 34.287,2.871 35.187,2.871 36.087,2.871 36.987,2.871 37.887,2.871 38.787,2.871 39.687,2.871 40.587,2.871 41.487,2.871 42.387,2.871 43.287,2.871 44.187,2.871 45.087,2.871 45.987,2.871 46.887,2.871 47.787,2.871 48.687,2.871 49.587,2.871 50.487,2.871 51.387,2.871 52.287,2.871 53.187,2.871 54.087,2.871 54.987,2.871 55.887,2.871 56.787,2.871 57.687,2.871 58.587,2.871 59.487,2.871 60.387,2.871 61.287,2.871 62.187,2.871 63.087,2.871 63.987,2.871 64.887,2.871 65.787,2.871 66.687,2.871 67.587,2.871 68.487,2.871 69.387,2.871 70.287,2.871 71.187,2.871 91.968,3.217 1.017,3.407 91.983,4.117 1.017,4.307 91.983,5.017 1.017,5.207 81.699,5.465 82.772,5.465 91.983,5.917 1.017,6.107 83.421,6.48 91.983,6.817 1.017,7.007 91.983,7.717 1.017,7.907 91.983,8.617 1.017,8.807 91.983,9.517 1.017,9.707 91.983,10.417 91.983,11.317 91.983,12.217 91.983,13.117 91.23,13.61 51,13.64 39.33,13.66 39.99,13.66 90.636,14.286 65.37,14.84 66.05,14.84 50.95,15.03 90.392,15.152 90.383,16.052 90.383,16.952 90.383,17.852 90.383,18.752 90.383,19.652 90.383,20.552 90.383,21.452 90.383,22.352 90.383,23.252 90.383,24.152 90.383,25.052 90.383,25.952 90.383,26.852 12.81,26.95 90.383,27.752 12.81,27.95 90.383,28.652 90.383,29.552 45.82,29.62 90.383,30.452 90.383,31.352 90.383,32.252 90.383,33.152 90.383,34.052 90.383,34.952 90.383,35.852 90.383,36.752 90.383,37.652 90.383,38.552 90.383,39.452 90.383,40.352 90.383,41.252 90.383,42.152 90.383,43.052 90.383,43.952 90.383,44.852 90.383,45.752 90.383,46.652 90.383,47.552 90.383,48.452 90.383,49.352 90.383,50.252 90.383,51.152 90.383,52.052 90.383,52.952 48.32,53.075 90.383,53.852 90.383,54.752 90.383,55.652 90.383,56.552 90.383,57.452 90.383,58.352 90.383,59.252 90.383,60.152 90.383,61.052 90.383,61.952 81.172,62.453 90.383,62.852 90.383,63.752 90.383,64.652 82.325,65.434 90.383,65.552 90.383,66.452 90.383,67.352 90.383,68.252 82.8,69.097 90.383,69.152 63.9,69.727 90.383,70.052 63.9,70.88 90.383,70.952 90.383,71.852 63.9,72 90.383,72.752 90.383,73.652 90.383,74.552 90.383,75.452 74.127,75.9 75.4,75.9 76.58,75.9 90.477,76.347 74.127,76.8 75.4,76.8 76.58,76.8 90.918,77.131 91.657,77.645 91.983,78.484 91.983,79.384 91.983,80.284 91.983,81.184 1.017,81.963 91.983,82.084 1.017,82.863 91.983,82.984 1.017,83.763 91.983,83.884 1.017,84.663 91.983,84.784 1.017,85.563 91.983,85.684 1.017,86.463 91.983,86.584 1.037,87.362 91.939,87.483 21.99,87.636 22.89,87.636 23.79,87.636 24.69,87.636 25.59,87.636 26.49,87.636 27.39,87.636 28.29,87.636 29.19,87.636 30.09,87.636 30.99,87.636 31.89,87.636 32.79,87.636 33.69,87.636 34.59,87.636 35.49,87.636 36.39,87.637 37.29,87.637 38.19,87.637 39.09,87.637 39.99,87.637 40.89,87.637 41.79,87.637 42.69,87.637 43.59,87.637 44.49,87.637 45.39,87.637 46.29,87.637 47.19,87.637 48.09,87.637 48.99,87.637 49.89,87.637 50.79,87.637 51.69,87.637 52.59,87.637 53.49,87.637 54.39,87.637 55.29,87.637 56.19,87.637 57.09,87.637 57.99,87.637 58.89,87.637 59.79,87.637 60.69,87.637 61.59,87.637 62.49,87.637 63.39,87.637 64.29,87.637 65.19,87.637 66.09,87.637 66.99,87.637 67.89,87.637 68.79,87.637 69.69,87.637 70.59,87.637 71.49,87.665 21.099,87.762 72.328,87.993 1.35,88.207 20.339,88.243 91.587,88.311 72.941,88.652 1.971,88.858 90.925,88.921 19.874,89.014 2.803,89.201 3.702,89.237 4.602,89.237 5.502,89.237 6.402,89.237 7.302,89.237 8.202,89.237 9.102,89.237 10.002,89.237 10.902,89.237 11.802,89.237 12.702,89.237 13.602,89.237 14.502,89.237 15.402,89.237 16.302,89.237 17.202,89.237 18.102,89.237 19.002,89.237 73.625,89.237 74.525,89.237 75.425,89.237 76.325,89.237 77.225,89.237 78.125,89.237 79.025,89.237 79.925,89.237 80.825,89.237 81.725,89.237 82.625,89.237 83.525,89.237 84.425,89.237 85.325,89.237 86.225,89.237 87.125,89.237 88.025,89.237 88.925,89.237 89.825,89.239
HD4_A0: R153.2 R154.2 U15.3 | length 3.3
  L1 TOP w0.2: U15.3@48.415,60.1 49.975,61.66 R154.2@50.027,61.66 R153.2@51.09,61.66
HD4_A1: R155.2 R156.2 U15.4 | length 2.7
  L1 TOP w0.2: U15.4@45.64,60.1 45.889,60.349 45.889,60.856 45.9,60.867 R156.2@45.9,61.658 ; R156.2@45.9,61.66 R155.2@46.963,61.66
HD4_CH11+: J9.3 U15.16 | length 9.3
  L1 TOP w0.5: U15.16@22.78,75.34 25.276,77.836 26.096,77.836 28.885,80.625 28.885,81.615 J9.3@28.9,81.63
HD4_CH11-: J9.4 U15.15 | length 9.9
  L1 TOP w0.5: U15.15@20.24,75.34 24.2,79.3 25.25,79.3 27.33,81.38 27.35,81.38 27.4,81.43 J9.4@27.4,81.63
HD4_CH12+: J9.2 U15.17 | length 8.5
  L1 TOP w0.5: U15.17@25.32,75.34 25.45,75.34 30.4,80.29 J9.2@30.4,81.63
HD4_CH12-: J9.1 U15.18 | length 8
  L1 TOP w0.5: U15.18@27.86,75.34 31.9,79.38 J9.1@31.9,81.63
HD4_CH21+: J9.7 U15.20 | length 23.7
  L1 TOP w0.5: J9.7@22.9,81.63 22.95,81.68 22.95,83.15 24.7,84.9 v2(34.3,84.9)
  L6 BOT w0.5: U15.20@32.94,75.34 32.94,75.341 34.3,76.701 v2(34.3,84.9)
HD4_CH21-: J9.8 U15.19 | length 26.1
  L1 TOP w0.5: J9.8@21.4,81.63 21.45,81.68 21.45,83.55 23.82,85.92 v2(33,85.92)
  L6 BOT w0.5: U15.19@30.4,75.34 33,77.94 v2(33,85.92)
HD4_CH22+: J9.6 U15.21 | length 21.3
  L1 TOP w0.5: J9.6@24.4,81.63 24.4,82.594 25.775,83.969 v2(35.55,83.969)
  L6 BOT w0.5: U15.21@35.48,75.34 35.55,75.41 v2(35.55,83.969)
HD4_CH22-: J9.5 U15.22 | length 20.1
  L1 TOP w0.5: J9.5@25.9,81.63 25.9,82.544 26.356,83 v2(36.6,83)
  L6 BOT w0.5: v2(36.6,83) 36.6,76.76 U15.22@38.02,75.34
HD4_CH31+: J8.3 U15.8 | length 42.8
  L1 TOP w0.5: v2(17.8,83.9) 17.8,71 25.7,63.1 32.48,63.1 U15.8@35.48,60.1
  L6 BOT w0.5: v2(17.8,83.9) 22.43,83.9 24.35,81.98 24.35,81.68 J8.3@24.4,81.63
HD4_CH31-: J8.4 U15.7 | length 46.4
  L1 TOP w0.5: v2(18.695,85.2) 18.695,71.805 26.5,64 34.12,64 U15.7@38.02,60.1
  L6 BOT w0.5: v2(18.695,85.2) 22.53,85.2 25.9,81.83 J8.4@25.9,81.63
HD4_CH32+: J8.2 U15.9 | length 39.6
  L1 TOP w0.5: v2(16.9,82.8) 16.9,69.9 24.6,62.2 30.84,62.2 U15.9@32.94,60.1
  L6 BOT w0.5: v2(16.9,82.8) 21.83,82.8 21.843,82.787 21.943,82.787 22.9,81.83 J8.2@22.9,81.63
HD4_CH32-: J8.1 U15.10 | length 36.1
  L1 TOP w0.5: v2(16,81.63) 16,68.99 23.69,61.3 29.2,61.3 U15.10@30.4,60.1
  L6 BOT w0.5: v2(16,81.63) J8.1@21.4,81.63
HD4_CH41+: J8.7 U15.12 | length 34.7
  L6 BOT w0.5: U15.12@25.32,60.1 25.32,63.48 17.6,71.2 17.6,76.6 19.384,78.384 27.254,78.384 30.25,81.38 30.35,81.38 30.4,81.43 J8.7@30.4,81.63
HD4_CH41-: J8.8 U15.11 | length 35.8
  L6 BOT w0.5: U15.11@27.86,60.1 27.86,62.94 18.425,72.375 18.425,76.135 19.49,77.2 27.57,77.2 31.75,81.38 31.85,81.38 31.9,81.43 J8.8@31.9,81.63
HD4_CH42+: J8.6 U15.13 | length 34
  L6 BOT w0.5: U15.13@22.78,60.1 22.78,64.02 16.8,70 16.8,77.8 18.4,79.4 26.77,79.4 28.75,81.38 28.85,81.38 28.9,81.43 J8.6@28.9,81.63
HD4_CH42-: J8.5 U15.14 | length 33.3
  L6 BOT w0.5: U15.14@20.24,60.1 20.24,64.75 15.9,69.09 15.9,78.859 17.341,80.3 26.27,80.3 27.4,81.43 J8.5@27.4,81.63
HD_A0: R84.2 R91.2 U11.7 | length 15.6
  L1 TOP w0.25: v1(34.73,69.2) 37.6,69.2 39.184,67.616 R91.2@39.184,63 R84.2@40.235,63
  L6 BOT w0.25: U11.7@32.94,72.82 32.8,72.68 32.8,70.5 34.1,69.2 v1(34.73,69.2)
HD_A1: R134.2 R135.2 U11.12 | length 8.8
  L1 TOP w0.25: U11.12@32.94,65.2 33.03,65.11 33.99,65.11 36.761,62.339 38.48,62.339 39.159,61.66 R135.2@39.184,61.66 R134.2@40.235,61.66
HD_CH1+: J6.1 U11.8 | length 24
  L6 BOT w0.5: U11.8@30.4,72.82 30.4,69.73 31.73,68.4 36.17,68.4 39.3,71.53 39.3,80.1 39.5,80.3 J6.1@39.5,81.63
HD_CH1-: J6.2 U11.9 | length 30.1
  L6 BOT w0.5: U11.9@27.86,72.82 27.86,69.94 30.5,67.3 37.37,67.3 41.9,71.83 41.9,78.2 41,79.1 41,79.373 J6.2@41,81.63
HD_CH2+: J6.3 U11.11 | length 26.2
  L1 TOP w0.5: U11.11@30.4,65.2 30.4,68.5 31.8,69.9 39.9,69.9 41.9,71.9 41.9,79.5 v2(42.5,80.1)
  L6 BOT w0.5: v2(42.5,80.1) J6.3@42.5,81.63
HD_CH2-: J6.4 U11.10 | length 32.7
  L1 TOP w0.5: U11.10@27.86,65.2 27.86,68.86 30.1,71.1 38.7,71.1 39.3,71.7 v2(39.3,82.8)
  L6 BOT w0.5: v2(39.3,82.8) 43.03,82.8 43.95,81.88 43.95,81.68 J6.4@44,81.63
HEATER_B_1: D18.2 J18.2 Q1.3 | length 14.4
  L6 BOT w0.4: Q1.3@73.326,57.091 73.686,57.091 73.786,57.191 73.786,57.195 74.144,57.553 74.985,57.553 D18.2@75.069,57.638 ; D18.2@75.069,57.663 75.369,57.963 75.394,57.963 76.231,58.8 79.7,58.8 82.2,61.3 82.2,62.922 82.828,63.55 J18.2@84.13,63.55
HEATER_B_2: D21.2 J18.4 Q4.3 | length 14.6
  L6 BOT w0.4: Q4.3@73.326,53.174 73.426,53.274 73.786,53.274 74.233,53.721 D21.2@75.069,53.721 ; D21.2@75.019,53.696 75.369,54.046 75.394,54.046 76.348,55 79.55,55 83,58.45 83,59.62 83.93,60.55 J18.4@84.13,60.55
HEATER_B_3: D19.2 J18.6 Q2.3 | length 16.4
  L6 BOT w0.4: Q2.3@73.326,49.257 73.686,49.257 73.786,49.357 73.786,49.396 74.21,49.82 75.885,49.82 77.065,51 80.52,51 82.553,53.033 82.553,56.743 83.321,57.511 84.091,57.511 J18.6@84.13,57.55
HEATER_B_4: D20.2 J18.8 Q3.3 | length 17.5
  L6 BOT w0.4: Q3.3@73.326,45.341 73.426,45.441 73.861,45.441 74.253,45.833 74.989,45.833 76.144,46.988 79.161,46.988 79.396,47.222 79.396,48.841 80.837,50.282 83.17,50.282 84.13,51.243 J18.8@84.13,54.55
HEATER_PWM_1: R71.2 R336.1 | length 54.1
  L1 TOP w0.2: R71.2@54.307,26.49 54.307,25.966 55.973,24.3 v1(56.522,24.3)
  L3 SIGNAL w0.2: v1(57.795,55.557) 57.852,55.5 59.5,55.5 60.7,54.3 63.7,54.3 64,54.6 74.521,54.6 v1(74.995,55.074)
  L6 BOT w0.2: v1(56.522,24.3) 56.522,48.822 57.8,50.1 v1@57.8,55.557 ; v1(74.995,55.074) 75.169,55.248 R336.1@75.169,55.841
HEATER_PWM_2: R27.2 R341.1 | length 17.2
  L1 TOP w0.2: R27.2@58.808,50.932 v1(59.602,50.932)
  L3 SIGNAL w0.2: v1(59.602,50.932) 60.058,50.475 67.874,50.475 68.431,51.032 73.596,51.032 v1(74.191,51.627)
  L6 BOT w0.2: v1(74.191,51.627) 74.245,51.627 74.542,51.924 R341.1@75.169,51.924
HEATER_PWM_3: R29.2 R337.1 | length 17.2
  L1 TOP w0.2: R29.2@58.808,48.024 59.576,48.024 v1(59.589,48.037)
  L3 SIGNAL w0.2: v1(59.589,48.037) 60.127,48.575 66.124,48.575 67.146,47.553 v1(74.061,47.553)
  L6 BOT w0.2: v1(74.061,47.553) 74.516,48.007 R337.1@75.169,48.007
HEATER_PWM_4: R69.2 R340.1 | length 50.1
  L1 TOP w0.2: v1(46.435,25.414) 46.439,25.419 R69.2@46.439,26.49
  L3 SIGNAL w0.2: v1(46.435,25.414) 48.25,23.6 69.558,23.6 69.658,23.7 v1(69.712,23.7)
  L6 BOT w0.2: v1(69.712,23.7) 69.7,23.712 69.7,42.601 70.624,43.525 74.578,43.525 75.144,44.091 R340.1@75.169,44.091
I2C_SCL: R138.2 U11.13 U12.7 | length 21.9
  L1 TOP w0.2: U12.7@45.055,79.55 45.055,79.032 45.629,78.458 v1(45.636,78.458) ; v1@45.636,78.454 45.638,78.454 46.164,77.927 R138.2@46.164,77.9
  L3 SIGNAL w0.2: U11.13@35.48,65.2 35.7,65.2 37.2,66.7 38.6,66.7 44.075,72.175 44.075,78.575 44.489,78.989 45.105,78.989 v1(45.636,78.458)
I2C_SCL_HD4: R159.2 U15.6 U16.7 | length 25.7
  L1 TOP w0.2: U16.7@50.376,79.55 50.376,78.984 50.562,78.799 50.562,78.563 50.619,78.506 50.619,77.919 R159.2@50.638,77.9
  L3 SIGNAL w0.2: U15.6@40.56,60.1 44.1,63.64 44.1,67 49.2,72.1 49.2,78.7 49.525,79.025 50.1,79.025 v1(50.6,78.525)
I2C_SDA: R139.2 U11.14 U12.6 | length 17.9
  L1 TOP w0.2: U12.6@44.405,79.55 44.405,78.664 44.596,78.473 44.596,78.402 44.959,78.039 R139.2@44.959,77.9
  L3 SIGNAL w0.2: U11.14@38.02,65.2 44.596,71.776 v1(44.596,78.454)
I2C_SDA_HD4: R160.2 U15.5 U16.6 | length 22.9
  L1 TOP w0.2: R160.2@49.52,77.9 49.662,78.042 49.662,78.487 49.713,78.538 49.713,79.537 U16.6@49.726,79.55
  L3 SIGNAL w0.2: U15.5@43.1,60.1 44.665,61.665 44.665,65.865 49.725,70.925 49.725,78.5 v1(49.7,78.525)
IR_LED_1_GND: C69.1 C70.1 D5.2 J11.2 L1.2 | length 38
  L1 TOP w0.5: v1(84.2,12.8) 84.2,15.91 84.6,16.31 85.946,16.31 J11.2@85.962,16.325
  L3 SIGNAL w0.5: v1(52.9,8.855) v1(53.6,8.855) 70.955,8.855 74.9,12.8 v1(84.2,12.8)
IR_LED_1_P: C69.2 C70.2 D5.1 J11.1 R173.2 U18.3 | length 41.9
  L1 TOP w0.5: v1(85.8,11.6) 85.8,14.925 85.95,15.075 J11.1@85.962,15.075
  L3 SIGNAL w0.5: v1(49.1,7.7) 71.4,7.7 75.3,11.6 v1(85.8,11.6)
  other v1: 49.8,7.7
IR_LED_2_GND: C74.1 C75.1 D7.2 J12.2 L2.2 | length 21.8
  L6 BOT w0.5: D7.2@71.083,18.489 71.283,18.689 71.283,19.101 71.982,19.8 76.501,19.8 78.401,17.9 86.5,17.9 87.7,16.7 87.7,15.5 87.275,15.075 J12.2@85.962,15.075
IR_LED_2_P: C74.2 C75.2 D7.1 J12.1 R176.2 U19.3 | length 15.4
  L6 BOT w0.5: R176.2@74.014,7.91 76.51,7.91 84.813,16.213 85.849,16.213 J12.1@85.962,16.325
LSM6DSOX_INT: R106.2 R149.2 U14.9 | length 12.9
  L1 TOP w0.2: R106.2@46.022,56.42 v1(46.022,57.6)
  L6 BOT w0.2: v1(46.022,57.6) 46.022,47.862 R149.2@46.419,47.464 46.325,47.37 46.325,46.235 U14.9@46.25,46.16
MCU_CAM1_EN: R82.2 R287.1 | length 99.1
  L1 TOP w0.2: v1(26.983,30.243) 27.011,30.243 28.208,31.44 R82.2@28.26,31.44
  L3 SIGNAL w0.2: v1(26.983,30.243) 27.826,29.4 33.6,29.4 34.4,28.6 60.84,28.6 61.24,28.2 v1(67.8,28.2) ; v1(68.159,68.026) 68.213,68.026 68.534,68.347 81.772,68.347 81.985,68.56 v1(82.35,68.56)
  L6 BOT w0.2: v1(67.8,28.2) 67.8,48.434 68.25,48.884 68.25,54.999 67.925,55.324 67.925,62.448 68.159,62.681 v1(68.159,68.026) ; R287.1@81.543,68.137 81.596,68.137 82.019,68.56 v1(82.35,68.56)
MCU_CAM2_EN: R103.2 R298.1 | length 40.2
  L1 TOP w0.2: R103.2@50.874,56.42 v1(50.874,57.11) ; R298.1@81.543,68.137 81.713,67.967 81.713,67.973 81.765,68.025 82.312,68.025 v1(82.35,67.987)
  L3 SIGNAL w0.2: v1(54.4,64.2) 67.83,64.2 69.564,65.934 70.171,65.934 72.223,67.987 v1(82.35,67.987)
  L6 BOT w0.2: v1(50.874,57.11) 52.664,58.9 53.6,58.9 54.4,59.7 v1(54.4,64.2)
MCU_CONSOLE_RX: R24.1 R26.2 R68.1 | length 83.5
  L1 TOP w0.2: v1(39.5,25.7) 39.524,25.724 39.524,26.466 R68.1@39.548,26.49
  L3 SIGNAL w0.2: v1(12.274,79.744) 12.274,52.826 15.8,49.3 15.8,43.2 14.705,42.105 14.705,31.543 16,30.248 16,26.05 17.35,24.7 32.7,24.7 33.7,25.7 v1(39.5,25.7)
  L6 BOT w0.2: v1(12.274,79.744) 12.274,80.261 R26.2@12.618,80.605 R24.1@13.71,80.605
MCU_CONSOLE_TX: R23.1 R25.2 R70.1 | length 84.9
  L1 TOP w0.2: v1(40.3,25.719) 40.319,25.719 40.529,25.929 R70.1@40.529,26.49
  L3 SIGNAL w0.2: v1(12.768,78.6) 12.729,78.562 12.729,78.42 12.699,78.39 12.699,53.301 16.3,49.7 16.3,43 15.1,41.8 15.1,31.608 16.4,30.308 16.4,26.37 17.515,25.255 29.532,25.255 31.291,27.014 39.005,27.014 v1(40.3,25.719)
  L6 BOT w0.2: R23.1@10.433,80.605 R25.2@11.525,80.605 11.525,79.837 12.762,78.6 v1(12.768,78.6)
MCU_FRAM_nCS: R59.2 R114.1 U6.1 | length 45.5
  L1 TOP w0.2: R59.2@51.37,26.465 51.37,26.452 52.162,25.66 52.162,25.238 v1(52.2,25.2) ; v1(59.86,56.875) R114.1@59.86,57.58 60.392,58.112 U6.1@61.526,58.112
  L3 SIGNAL w0.2: v1(52.2,25.2) 54.407,25.2 54.704,24.903 v1(60.572,24.903)
  L6 BOT w0.2: v1(59.86,56.875) 60.629,56.106 60.629,44.071 61.275,43.425 61.275,25.606 v1(60.572,24.903)
MCU_HD4_I2C_EN: R102.2 R163.1 U16.5 | length 40.5
  L1 TOP w0.2: R163.1@48.401,77.9 48.409,77.908 48.409,78.408 48.997,78.996 49.007,78.996 49.063,79.052 U16.5@49.063,79.537 ; U16.5@49.076,79.55 49.076,80.075 49.701,80.7 51.081,80.7 55.881,75.9 v1(55.881,75.34) ; R102.2@58.808,51.901 v1(59.5,51.9)
  L6 BOT w0.2: v1(55.881,75.34) 55.881,69.319 57.8,67.4 59.969,67.4 61.1,66.269 61.1,61.444 59.25,59.594 59.25,52.724 59.5,52.474 v1(59.5,51.9)
MCU_HD_I2C_EN: R73.2 R332.1 U12.5 | length 33.1
  L1 TOP w0.2: R73.2@49.935,56.42 49.935,57.169 50.352,57.586 v1(50.352,57.6)
  L1 TOP w0.25: R332.1@43.927,77.9 43.768,78.06 43.768,78.234 43.755,78.246 U12.5@43.755,79.55 43.775,79.569 43.775,80.165 43.788,80.178 43.788,80.364 44.224,80.8 46.738,80.8 v1(48.113,79.425)
  L6 BOT w0.2: v1(48.113,79.425) 49.5,78.038 49.5,71.9 52,69.4 52,59.248 v1(50.352,57.6)
MCU_I2C0_SCL: R36.2 R127.2 R136.2 R157.2 R161.1 R247.2 R321.1 U9.2 U10.2 U25.4 | length 135.1
  L1 TOP w0.2: U25.4@29.133,26.483 29.141,26.492 29.892,26.492 v1(29.9,26.5) 29.938,26.462 30.659,26.462 R247.2@30.715,26.406 ; R321.1@44.501,86.2 44.514,86.188 45.111,86.188 v1(45.124,86.175) ; v1@45.124,86.2 R136.2@45.698,86.2 ; R161.1@50.483,86.2 50.495,86.188 51.076,86.188 v1(51.088,86.175) ; v1@51.088,86.2 R157.2@51.757,86.2 ; R127.2@56.398,80.025 57,79.424 v1(57,79.4) 57.054,79.4 57.379,79.075 U9.2@58.395,79.075 ; R36.2@58.808,32.017 58.816,32.008 60.417,32.008 v1(60.425,32)
  L3 SIGNAL w0.2: v1(29.9,26.5) 30.95,27.55 45.635,27.55 45.685,27.5 v1(60.425,27.5) ; v1(45.124,86.175) 45.549,86.6 50.663,86.6 v1(51.088,86.175) ; v1@51.138,86.175 57,80.313 v1(57,79.4) 58.099,78.301 60.3,78.301 v1(60.314,78.288)
  L6 BOT w0.2: v1(29.9,26.5) 30.365,26.965 30.365,55.627 32.682,57.944 37.702,57.944 39.585,59.827 39.585,67.467 44.665,72.547 44.665,76.561 46.061,77.957 46.061,85.238 v1(45.124,86.175) ; v1(60.314,78.288) 60.327,78.301 61.084,78.301 61.829,79.046 62.466,79.046 U10.2@62.495,79.075 ; v1(60.425,27.5) v1(60.425,32)
MCU_I2C0_SDA: R33.2 R126.2 R137.2 R158.2 R162.1 R248.2 R331.1 U9.3 U10.3 U25.5 | length 147.3
  L1 TOP w0.2: U25.5@28.108,27.508 28.108,27.558 28.183,27.633 29.864,27.633 v1(29.875,27.622) ; v1@29.879,27.627 v1@29.883,27.622 ; v1@29.888,27.627 29.895,27.62 29.902,27.627 30.708,27.627 R248.2@30.715,27.633 ; R137.2@42.109,86.2 42.121,86.187 42.631,86.187 v1(42.643,86.175) ; v1@42.643,86.2 R331.1@43.305,86.2 ; R158.2@48.09,86.2 48.092,86.2 48.554,85.738 48.583,85.738 48.646,85.675 v1(48.7,85.675) ; v1@48.7,85.7 48.738,85.738 48.823,85.738 49.284,86.2 R162.1@49.286,86.2 ; R126.2@56.398,78.75 56.423,78.75 56.885,78.288 57.016,78.288 v1(57.054,78.25) 57.096,78.25 57.271,78.425 U9.3@58.395,78.425 ; R33.2@58.808,43.178 58.822,43.164 59.758,43.164 59.908,43.014 60.062,43.014 v1(60.1,42.976)
  L3 SIGNAL w0.2: v1(29.875,27.622) 29.903,27.622 30.281,28 v1(60,28) ; v1(42.643,86.175) 42.678,86.175 43.173,85.68 48.695,85.68 v1(48.7,85.675) 49.629,85.675 v1(57.054,78.25) 57.054,78.196 57.4,77.85 v1(60.62,77.85)
  L6 BOT w0.2: v1(29.875,27.622) 29.875,57.154 31.346,58.625 37.924,58.625 39.26,59.961 39.26,67.601 44.171,72.512 44.171,78.63 44.525,78.984 44.525,84.293 v1(42.643,86.175) ; v1(60,28) 60,42.822 60.1,42.922 v1(60.1,42.976) ; v1(60.62,77.85) 61.207,77.85 61.754,78.396 62.466,78.396 U10.3@62.495,78.425
MCU_I2C1_SCL: R97.1 R119.1 R143.1 R150.1 R285.1 R296.1 U7.4 | length 62.1
  L1 TOP w0.2: v1(49.8,58.5) 50.467,58.5 51.752,57.215 R97.1@51.752,56.42 ; R143.1@62.7,54.43 62.715,54.43 63.211,54.926 v1(63.211,54.937) ; v1(69.7,65.048) 69.71,65.058 70.759,65.058 R296.1@70.769,65.069
  L3 SIGNAL w0.2: v1(50.398,46.16) 50.452,46.16 50.612,46 v1(63.025,46) ; v1(63.211,54.937) 63.975,55.7 67.7,55.7 68.775,56.775 v1(68.775,56.8) ; v1(69.71,63.1) v1(71.2,63.1)
  L6 BOT w0.2: R150.1@49.619,46.164 49.621,46.162 50.396,46.162 v1(50.398,46.16) 50.398,49.702 49.8,50.3 v1(49.8,58.5) ; v1(63.025,46) 63.025,48.725 64.4,50.1 64.4,53.748 v1(63.211,54.937) ; v1(68.775,56.8) 68.775,62.165 v1(69.71,63.1) 69.705,63.105 69.705,65.043 v1(69.7,65.048) 69.71,65.058 R285.1@70.814,65.058 ; v1(71.2,63.1) 71.505,63.1 71.622,62.983 71.622,62.581 71.818,62.384 73.925,62.384 U7.4@73.994,62.453
MCU_I2C1_SDA: R92.1 R120.1 R142.2 R151.1 R286.1 R297.1 U7.5 | length 70.6
  L1 TOP w0.2: R92.1@58.808,52.87 58.823,52.885 59.66,52.885 v1(59.675,52.9) ; v1(61.054,53.875) 61.065,53.875 61.555,54.366 R142.2@61.555,54.38 ; R142.2@61.555,54.405 62.55,55.4 v1(68.45,55.4) ; v1(69.9,70.134) R297.1@70.77,70.134
  L3 SIGNAL w0.2: v1(50.398,45.135) 60.465,45.135 v1(61.2,44.4) ; v1(50.874,53.075) 50.912,53.037 59.484,53.037 59.621,52.9 v1(59.675,52.9) ; v1(69.2,64.3) 69.22,64.32 71.58,64.32 v1(71.6,64.339)
  L6 BOT w0.2: R151.1@49.619,44.864 50.127,44.864 51.044,45.781 51.044,49.756 50.4,50.4 50.4,52.601 v1(50.874,53.075) ; v1(61.054,53.875) 61.093,53.837 61.093,44.561 61.2,44.454 v1(61.2,44.4) ; v1(68.45,55.4) 68.45,55.454 68.35,55.554 68.35,62.413 69.2,63.263 v1(69.2,64.3) 69.2,69.434 v1(69.9,70.134) R286.1@70.77,70.134 ; v1(71.6,64.339) 71.622,64.318 71.622,63.923 71.796,63.748 71.804,63.748 R120.1@71.826,63.727 ; R120.1@71.851,63.727 72.324,63.253 U7.5@73.994,63.253
MCU_IR_LED_1_PWM: R79.2 R174.2 R175.1 | length 27.2
  L1 TOP w0.2: v1(40.529,24.241) 47.452,24.241 48.406,25.196 R79.2@48.406,26.467
  L3 SIGNAL w0.2: v1(40.529,24.241) 40.51,24.223 40.51,19.564 43.664,16.41 v1(48.04,16.41)
  L6 BOT w0.3: v1(48.04,16.41) 48.515,15.935 48.515,14.924 R175.1@48.542,14.897
  L6 BOT w0.4: R174.2@48.542,12.511 R175.1@48.542,14.897
MCU_IR_LED_2_PWM: R177.2 R178.1 R303.2 | length 32.7
  L1 TOP w0.2: R303.2@52.34,26.49 52.407,26.423 52.407,25.996 53.2,25.204 v1(53.2,24.7)
  L3 SIGNAL w0.2: v1(53.25,21.8) 68.3,21.8 74.03,16.07 v1(74.849,16.07)
  L6 BOT w0.2: v1(53.2,24.7) 53.225,24.675 53.225,21.825 v1(53.25,21.8)
  L6 BOT w0.3: R177.2@74.614,12.511 R178.1@74.614,14.898 74.849,15.133 v1@74.849,16.058
MCU_JTAGSEL: TP2.1 U5.104 | length 1.9
  L1 TOP w0.2: U5.104@53.172,48.064 54.775,48.064 TP2.1@54.984,48.274